# Altium PCB PCB4.PcbDoc (part 4 of 5)
Units mm, origin at the board's own origin, x right, y up, seen from the top; angles counter-clockwise.
Board outline 240 x 180 mm, 2 copper layers (Top Layer, Bottom Layer); 259 components, 311 nets, 1128 pads, 419 vias.
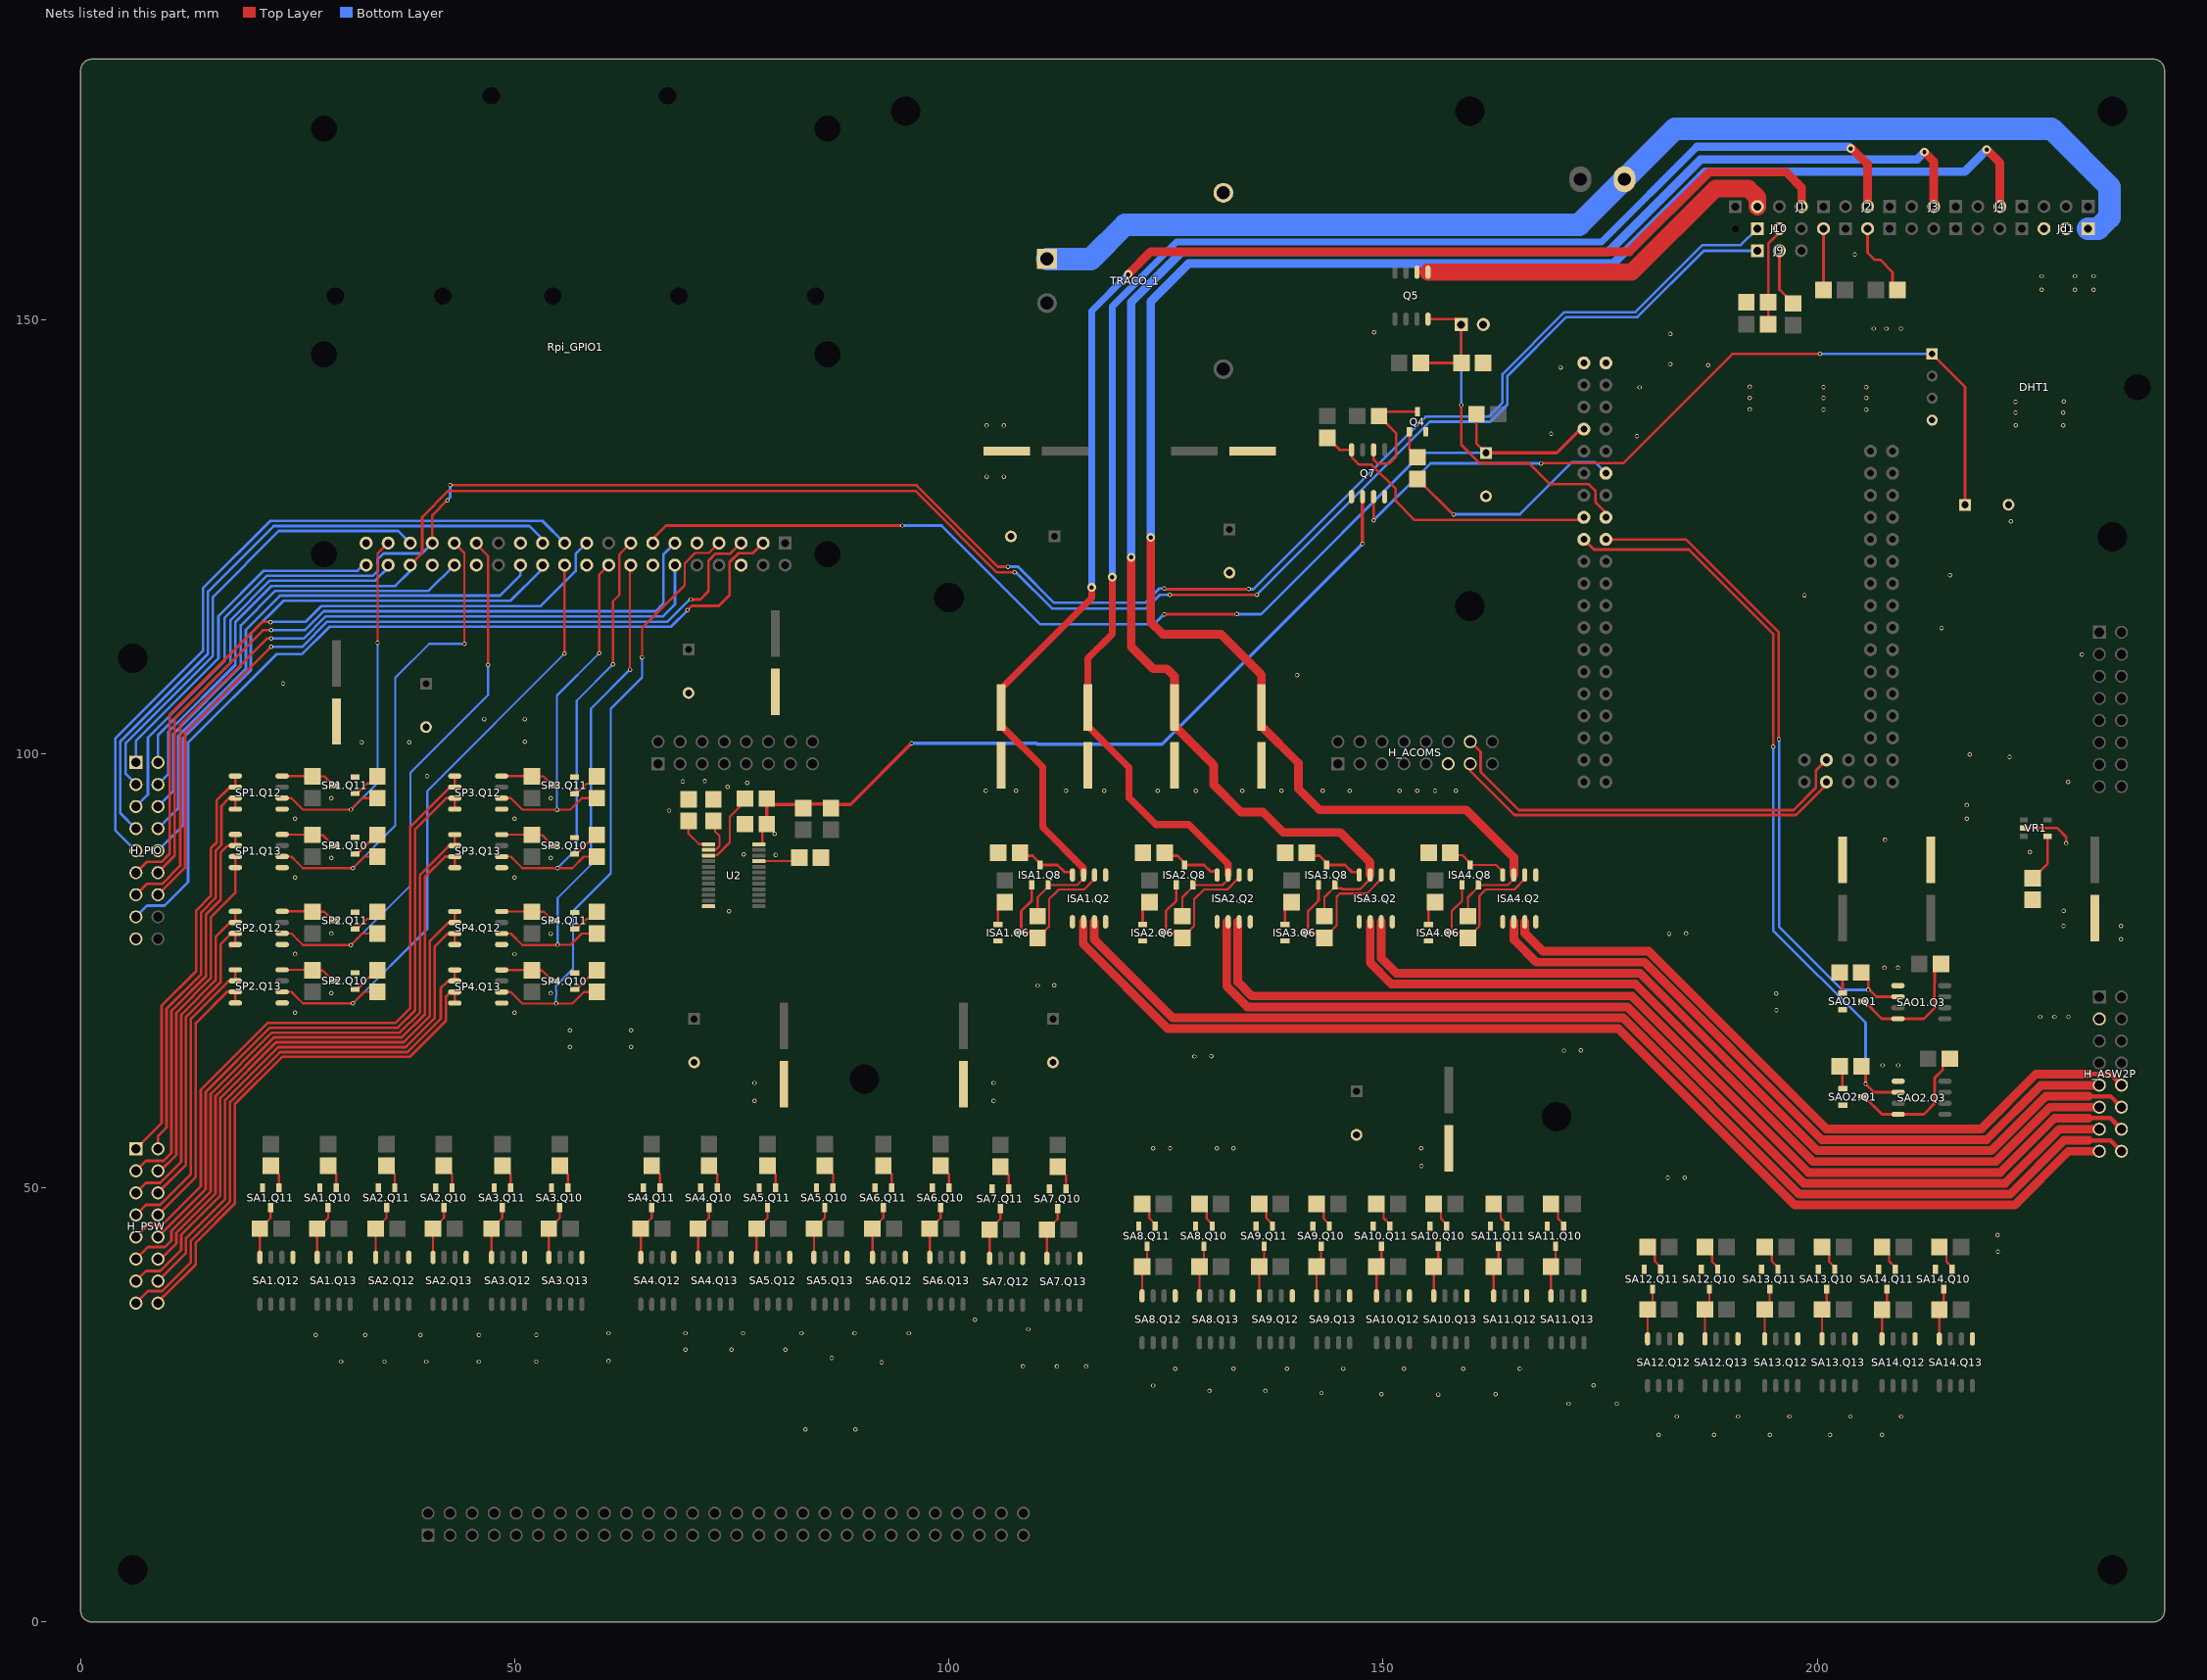
[diagram p3: the nets of this part, all layers, seen from the top]

## Via types
v1: diameter 0.5, hole 0.3, Top Layer to Bottom Layer, 387 vias
v2: diameter 0.5, hole 0.3, Top Layer to Bottom Layer, tented both sides, 24 vias
v3: diameter 1, hole 0.5, Top Layer to Bottom Layer, 8 vias

## Nets (pads, with @x,y where several pads share a name; then routed paths per layer and width w, separated by ;. In a path a pad name is that pad's centre, name@x,y a point inside that pad or via, vN(x,y) a via of type N, cw(c..) or ccw(c..) an arc to the next point about the centre after c; other vN are vias at no path point) (continued)
D02: pad.D2 R10.1 | length 26.4
  Top Layer w0.305: R10.1@153.966,131.66 158.053,127.574 v1(158.138,127.574)
  Bottom Layer w0.305: v1(158.138,127.574) 165.77,127.574 171.75,133.555 174.421,133.555 pad.D2@175.666,132.31
D06: JW1.1 pad.D6 Q5.4 R16D.2 R16U.1 | length 48.3
  Top Layer w0.305: R16U.1@154.354,145.01 R16D.2@159.024,145.01 159.006,145.028 JW1.1@159.006,149.44 158.38,150.066 Q5.4@155.171,150.066 ; v1(159.024,140.163) 159.024,135.565 161.147,133.442 166.838,133.442 169.238,131.042 173.713,131.042 174.459,130.297 174.459,128.979 175.437,128 175.437,127.459 pad.D6@175.666,127.23
  Bottom Layer w0.305: v1(159.024,140.163) JW1.1@159.024,149.44
D07: pad.D7 Q7.4 R4.1 | length 34.9
  Top Layer w0.305: R4.1@143.588,136.396 144.974,135.01 Q7.4@146.365,135.01 146.418,134.957 146.418,134.127 147.244,133.301 148.662,133.301 151.454,130.509 151.454,129.1 153.637,126.918 172.814,126.918 pad.D7@173.126,127.23
D08: pad.D8 SAO1.Q3.2 SAO1.R8.1 | length 77.4
  Top Layer w0.305: pad.D8@175.666,124.69 184.85,124.69 195.569,113.971 195.569,101.674 v1(195.594,101.649) ; SAO1.R8.1@205.084,74.8 205.882,74.002 v1@205.882,72.99 ; v1(205.882,72.81) 206.009,72.81 206.796,72.023 SAO1.Q3.2@209.3,72.023
  Bottom Layer w0.305: v1(195.594,101.649) 195.611,101.632 195.611,80.068 202.869,72.81 v1(205.882,72.81)
D09: pad.D9 SAO2.Q3.2 SAO2.R8.1 | length 88.9
  Top Layer w0.305: pad.D9@173.126,124.69 174.3,123.516 185.225,123.516 194.937,113.805 v1(194.937,100.81) ; SAO2.R8.1@205.094,63.988 205.576,63.506 v1(205.576,61.981) 206.541,61.016 SAO2.Q3.2@209.324,61.016
  Bottom Layer w0.305: v1(194.937,100.81) 194.937,79.652 205.576,69.013 v1(205.576,61.981)
GND: C1.2 C2.2 C3.2 C4.2 C5.2 C6.2 C7.2 C8.2 C9.2 C10.2 C11.2 C12.2 C13.2 C14.2 C15.2 C17.2 C18.2 C24.2 C25.2 C28.2 C29.2 C30.2 C31.2 DHT1.4 H_ACOMS.11 H_ASW2P.3 H_PIO.17 ISA1.Q2.1 ISA1.Q6.2 ISA1.R15.2 ISA2.Q2.1 ISA2.Q6.2 ISA2.R15.2 ISA3.Q2.1 ISA3.Q6.2 ISA3.R15.2 ISA4.Q2.1 ISA4.Q6.2 ISA4.R15.2 Jd1.2 Jd1.3 JW1.2 pad.GND@1 pad.GND@2 Q4.2 R6.2 R16D.1 R20.2 R21.2 R22.2 Rpi_GPIO1.6 Rpi_GPIO1.9 Rpi_GPIO1.14 Rpi_GPIO1.20 Rpi_GPIO1.25 Rpi_GPIO1.30 Rpi_GPIO1.34 Rpi_GPIO1.39 SA1.Q10.2 SA1.Q11.2 SA1.Q12.1 SA1.Q13.1 SA2.Q10.2 SA2.Q11.2 SA2.Q12.1 SA2.Q13.1 SA3.Q10.2 SA3.Q11.2 SA3.Q12.1 SA3.Q13.1 SA4.Q10.2 SA4.Q11.2 SA4.Q12.1 SA4.Q13.1 SA5.Q10.2 SA5.Q11.2 SA5.Q12.1 SA5.Q13.1 SA6.Q10.2 SA6.Q11.2 SA6.Q12.1 SA6.Q13.1 SA7.Q10.2 SA7.Q11.2 SA7.Q12.1 SA7.Q13.1 SA8.Q10.2 SA8.Q11.2 SA8.Q12.1 SA8.Q13.1 SA9.Q10.2 SA9.Q11.2 SA9.Q12.1 SA9.Q13.1 SA10.Q10.2 SA10.Q11.2 SA10.Q12.1 SA10.Q13.1 SA11.Q10.2 SA11.Q11.2 SA11.Q12.1 SA11.Q13.1 SA12.Q10.2 SA12.Q11.2 SA12.Q12.1 SA12.Q13.1 SA13.Q10.2 SA13.Q11.2 SA13.Q12.1 SA13.Q13.1 SA14.Q10.2 SA14.Q11.2 SA14.Q12.1 SA14.Q13.1 SAO1.Q1.2 SAO1.Q3.1 SAO2.Q1.2 SAO2.Q3.1 SP1.Q10.2 SP1.Q11.2 SP1.Q12.1 SP1.Q13.1 SP2.Q10.2 SP2.Q11.2 SP2.Q12.1 SP2.Q13.1 SP3.Q10.2 SP3.Q11.2 SP3.Q12.1 SP3.Q13.1 SP4.Q10.2 SP4.Q11.2 SP4.Q12.1 SP4.Q13.1 TRACO_1.2 U2.12 VR1.2 | length 6.1
  Top Layer w0.305: VR1.2@223.795,91.44 227.67,91.44 228.68,90.43 v1(228.68,89.68)
  other v1: 181.734,21.55 188.121,21.55 194.534,21.55 201.465,21.55 207.478,21.55 83.487,22.185 89.216,22.185 183.838,23.674 190.877,23.674 196.825,23.674 203.827,23.674 209.688,23.674 171.359,25.136 176.923,25.136 156.359,26.203 149.809,26.224 162.953,26.245 142.907,26.379 129.989,26.608 136.444,26.608 123.539,27.222 174.254,27.256 126.053,29.153 132.783,29.153 138.914,29.153 152.412,29.153 159.245,29.153 165.742,29.153 145.404,29.192 108.54,29.43 112.432,29.43 115.787,29.43 92.241,29.919 29.974,29.99 34.982,29.99 39.807,29.99 45.867,29.99 52.471,29.99 60.794,30.054 86.492,30.417 69.659,31.356 74.969,31.356 81.146,31.356 27.05,33.064 32.771,33.064 39.129,33.064 45.867,33.064 52.471,33.064 60.794,33.261 69.659,33.261 76.281,33.261 82.999,33.261 89.137,33.261 95.393,33.261 109.124,33.714 102.994,34.802 220.809,42.659 220.795,44.59 182.786,51.17 184.716,51.183 154.408,52.534 123.539,54.548 125.47,54.548 130.846,54.548 132.777,54.548 154.394,54.548 77.595,60.029 105.155,60.029 77.595,62.089 105.155,62.089 207.532,64.118 209.341,64.118 128.288,65.135 130.219,65.149 170.83,65.814 172.761,65.828 56.347,66.222 63.396,66.222 56.333,68.153 63.382,68.153 225.705,69.699 227.349,69.699 228.934,69.699 24.68,70.182 49.956,70.172 195.308,70.451 195.294,72.382 54.154,72.415 28.877,72.426 110.203,73.314 112.134,73.328 207.751,75.35 209.3,75.35 24.68,76.933 49.957,76.923 234.995,78.66 28.877,79.298 54.154,79.288 182.956,79.286 184.887,79.3 228.37,80.16 234.995,80.16 228.373,81.933 133.375,83.06 114.656,83.09 116.754,83.076 131.286,83.076 148.056,83.143 166.543,83.143 149.987,83.157 164.698,83.157 24.679,85.772 49.954,85.763 28.877,88.015 54.152,88.007 224.5,88.7 207.83,90.076 49.955,92.514 24.68,92.522 217.217,92.517 217.217,94.078 28.877,94.888 54.152,94.879 104.255,95.742 107.715,95.742 113.465,95.742 117.87,95.742 124.028,95.742 128.446,95.742 133.778,95.742 138.295,95.742 143.049,95.742 146.165,95.742 151.909,95.742 153.947,95.742 155.994,95.742 158.377,95.742 228.892,96.77 39.892,97.448 222.163,99.632 217.56,99.93 32.339,101.335 37.852,101.335 51.156,101.39 46.458,103.994 51.156,103.994 23.308,108.074 140.09,109.06 230.507,111.439 214.32,114.49 198.526,118.268 215.287,120.54 222.3,126.78 179.231,136.596 169.363,136.85 222.86,137.84 228.355,137.84 222.84,139.296 228.355,139.296 200.723,139.645 205.64,139.645 192.24,139.66 222.84,140.522 228.387,140.589 200.723,140.97 205.64,140.97 192.24,140.985 179.544,142.194 200.723,142.24 205.64,142.24 192.24,142.255 170.437,144.501 187.441,144.767 183.074,144.856 183.074,148.373 148.98,148.559 206.528,148.96 207.954,148.96 209.64,148.96 225.878,153.43 229.687,153.43 231.843,153.43 225.878,155 229.687,155 231.843,155 204.34,157.52
  other v2: 74.655,81.849 80.054,88.342 76.372,88.392 67.758,93.454 74.488,96.184 76.76,96.649 69.341,96.793 71.879,96.841
GND-12V: C22.2 C23.2 Jd1.1 P1.1 TRACO_1.1 | length 137.9
  Bottom Layer w2.6: TRACO_1.1@111.294,156.99 116.35,156.99 120.28,160.92 172.556,160.92 P1.1@177.804,166.168 183.632,171.996 226.963,171.996 233.674,165.285 233.674,161.78 232.374,160.48 Jd1.1@231.203,160.48
  other v1: 104.33,131.92 106.328,131.92 104.33,137.8 106.328,137.8
HS_I2C_SW: C28.1 Q7.5 Q7.6 R19.1 R23.1 R24.1 U2.24 | length 92.3
  Top Layer w0.254: U2.24@78.516,89.575 C28.1@78.516,91.905
  Top Layer w0.381: R19.1@79.016,94.5 C28.1@79.016,91.905 C28.1@79.034,91.923 ; R19.1@79.016,94.836 79.678,94.174 82.811,94.174 R23.1@83.236,93.75 83.689,94.203 85.949,94.203 R24.1@86.402,93.75 ; R24.1@86.402,94.15 88.637,94.15 v1(95.687,101.2) ; v1(147.635,124.187) Q7.6@147.635,129.61
  Bottom Layer w0.381: v1(95.687,101.2) 110.094,101.2 110.183,101.111 124.559,101.111 v1(147.635,124.187)
  other v2: 79.916,90.786
INV_5V12V_HS_1: H_ASW2P.15 ISA1.Q2.5 ISA1.Q2.6 | length 134.6
  Top Layer w1: ISA1.Q2.6@115.464,80.648 115.464,78.108 125.23,68.342 177.1,68.342 197.42,48.022 199.867,48.022 222.736,48.022 228.934,54.22 H_ASW2P.15@232.5,54.22
INV_5V12V_HS_2: H_ASW2P.13 ISA2.Q2.5 ISA2.Q2.6 | length 119.9
  Top Layer w1: ISA2.Q2.6@131.994,80.647 131.994,73.225 134.369,70.85 178.139,70.85 198.459,50.53 208.125,50.53 221.652,50.53 227.882,56.76 H_ASW2P.13@232.5,56.76
INV_5V12V_HS_3: H_ASW2P.11 ISA3.Q2.5 ISA3.Q2.6 | length 100.8
  Top Layer w1: ISA3.Q2.6@148.524,80.647 148.524,75.918 150.96,73.482 179.054,73.482 199.498,53.038 207.086,53.038 220.568,53.038 226.83,59.3 H_ASW2P.11@232.5,59.3
INV_5V12V_HS_4: H_ASW2P.9 ISA4.Q2.5 ISA4.Q2.6 | length 81.7
  Top Layer w1: ISA4.Q2.6@165.07,80.647 165.07,78.571 167.651,75.99 180.093,75.99 200.537,55.546 219.509,55.546 225.785,61.822 232.482,61.822 H_ASW2P.9@232.5,61.84
INV_5V12V_LS_1: H_ASW2P.16 ISA1.Q2.7 ISA1.Q2.8 | length 135.6
  Top Layer w0.5: 231.23,55.474 233.786,55.474 H_ASW2P.16@235.04,54.22
  Top Layer w1: ISA1.Q2.7@116.734,80.648 116.734,78.611 125.749,69.596 177.62,69.596 197.94,49.276 208.644,49.276 222.217,49.276 228.415,55.474 231.23,55.474
INV_5V12V_LS_2: H_ASW2P.14 ISA2.Q2.7 ISA2.Q2.8 | length 120.9
  Top Layer w0.5: 231.23,58.046 233.754,58.046 H_ASW2P.14@235.04,56.76
  Top Layer w1: ISA2.Q2.7@133.264,80.647 133.264,73.728 134.888,72.104 178.659,72.104 198.979,51.784 207.605,51.784 221.087,51.784 227.349,58.046 231.23,58.046
INV_5V12V_LS_3: H_ASW2P.12 ISA3.Q2.7 ISA3.Q2.8 | length 101.7
  Top Layer w0.5: 231.23,60.554 233.786,60.554 H_ASW2P.12@235.04,59.3
  Top Layer w1: ISA3.Q2.7@149.794,80.647 149.794,76.456 151.514,74.736 179.574,74.736 200.018,54.292 206.566,54.292 220.048,54.292 226.31,60.554 231.23,60.554
INV_5V12V_LS_4: H_ASW2P.10 ISA4.Q2.7 ISA4.Q2.8 | length 82.5
  Top Layer w0.5: 231.23,63.116 233.764,63.116 H_ASW2P.10@235.04,61.84
  Top Layer w1: ISA4.Q2.7@166.324,80.647 166.324,79.338 168.418,77.244 180.612,77.244 201.056,56.8 218.9,56.8 225.21,63.11 231.23,63.11
ISA1.Vss: C10.1 ISA1.Q2.3 ISA1.Q8.2 ISA1.R14.2 J1.2 | length 173.5
  Top Layer w0.254: ISA1.R14.2@110.22,81.3 110.22,83.458 111.435,84.672 ISA1.Q8.2@111.435,84.897 111.441,84.891 114.782,84.891 115.464,85.573 ISA1.Q2.3@115.464,86.048
  Top Layer w0.8: ISA1.Q2.3@115.464,86.048 115.464,86.863 110.788,91.539 110.788,98.457 106.17,103.075 106.1,103.075 106,103.175 106,107.525 106.1,107.625 106.106,107.625 116.428,117.947 v3(116.428,119.158)
  Top Layer w1: v3(120.65,155.22) 120.656,155.22 123.264,157.828 178.378,157.828 187.532,166.982 196.442,166.982 198.222,165.203 198.222,163.058 J1.2@198.183,163.02
  Bottom Layer w0.8: v3(116.428,119.158) 116.428,150.992 120.65,155.214 v3(120.65,155.22)
ISA2.Vss: C8.1 ISA2.Q2.3 ISA2.Q8.2 ISA2.R14.2 J2.2 | length 184.8
  Top Layer w0.254: ISA2.R14.2@126.878,81.3 126.878,83.458 128.092,84.672 ISA2.Q8.2@128.092,84.897 128.103,84.886 129.197,84.886 129.202,84.891 131.519,84.891 131.994,85.367 ISA2.Q2.3@131.994,86.047
  Top Layer w0.8: v3(118.798,120.344) 118.798,113.798 115.996,110.996 115.996,105.354 C8.1@116,105.35 116,103.175 120.75,98.425 120.75,94.942 123.846,91.846 127.631,91.846 132.156,87.321 ISA2.Q2.3@132.156,86.047
  Top Layer w1: v3(203.851,169.706) 203.995,169.706 205.803,167.898 J2.2@205.803,163.03
  Bottom Layer w0.8: v3(118.798,120.344) 118.798,151.538 126.21,158.95 175.176,158.95 186.142,169.916
  Bottom Layer w1: 186.142,169.916 203.642,169.916 v3(203.851,169.706)
ISA3.Vss: C9.1 ISA3.Q2.3 ISA3.Q8.2 ISA3.R14.2 J3.2 | length 198.3
  Top Layer w0.254: ISA3.R14.2@143.245,81.3 143.245,83.458 ISA3.Q8.2@144.46,84.672 ; ISA3.Q8.2@144.46,84.897 ISA3.Q8.2@144.46,84.886 ; ISA3.Q2.3@148.5,86.072 148.5,85.548 147.354,84.402 145.286,84.402 145.189,84.499 144.633,84.499 ISA3.Q8.2@144.46,84.672 ; ISA3.Q8.2@144.46,84.672 ISA3.Q8.2@144.46,84.886 ; ISA3.Q8.2@144.46,84.672 ISA3.Q8.2@144.46,84.886
  Top Layer w1: v3(120.992,122.627) 120.992,112.34 123.544,109.788 125.112,109.788 126,108.9 126,103.175 130.498,98.677 130.498,96.436 133.646,93.288 136.16,93.288 138.508,90.94 145.068,90.94 148.5,87.508 ISA3.Q2.3@148.5,86.072 ; v3(212.347,169.297) 213.423,168.22 J3.2@213.423,163.03
  Bottom Layer w1: v3(120.992,122.627) 120.992,152.008 126.78,157.796 175.922,157.796 186.578,168.452 211.502,168.452 v3(212.347,169.297)
ISA4.Vss: C11.1 ISA4.Q2.3 ISA4.Q8.2 ISA4.R14.2 J4.2 | length 216.8
  Top Layer w0.254: ISA4.R14.2@159.775,81.3 159.775,83.458 160.99,84.672 ISA4.Q8.2@160.99,84.897 160.996,84.891 164.373,84.891 165.054,85.572 ISA4.Q2.3@165.054,86.047
  Top Layer w1: v3(123.242,124.921) 123.242,115.16 124.628,113.774 131.33,113.774 136,109.104 C11.1@136,105.35 136,103.175 140.25,98.925 140.25,95.958 142.674,93.534 159.574,93.534 165.054,88.054 ISA4.Q2.3@165.054,86.047 ; v3(219.524,169.58) 221.043,168.06 J4.2@221.043,163.03
  Bottom Layer w1: v3(123.242,124.921) 123.242,152.092 127.6,156.45 176.518,156.45 187.106,167.038 216.982,167.038 v3(219.524,169.58)
MISO: H_ACOMS.13 pad.D50 | length 45.7
  Top Layer w0.305: H_ACOMS.13@160.04,98.85 160.04,98.01 165.106,92.944 197.556,92.944 201.066,96.454 pad.D50@201.066,96.75
MOSI: H_ACOMS.14 pad.D51 | length 49.2
  Top Layer w0.305: H_ACOMS.14@160.04,101.39 161.23,100.2 161.23,97.9 165.628,93.502 197.268,93.502 199.85,96.084 199.85,98.074 pad.D51@201.066,99.29
NetC29_1: C29.1 DHT1.1 Q7.7 Q7.8 | length 94
  Top Layer w0.305: v1(148.905,126.876) Q7.7@148.905,129.61 ; v1(168.21,133.442) 168.234,133.466 177.652,133.466 190.235,146.05 v1(200.309,146.05) ; DHT1.1@213.234,146.05 217.03,142.254 C29.1@217.03,128.68
  Bottom Layer w0.305: v1(148.905,126.876) 155.471,133.442 v1(168.21,133.442) ; v1(200.309,146.05) 213.027,146.05 213.13,145.946 DHT1.1@213.234,146.05
NetC30_1: C30.1 VR1.4 | length 5.5
  Top Layer w0.305: C30.1@224.83,85.67 226.545,87.385 VR1.4@226.545,90.49
NetISA1.Q2_2: ISA1.Q2.2 ISA1.Q6.3 ISA1.Q8.1 ISA1.R14.1 | length 20.2
  Top Layer w0.254: ISA1.R14.1@110.22,78.8 111.511,80.091 111.511,80.152 111.551,80.192 111.551,83.261 112.673,84.383 115.57,84.383 116.734,85.547 ISA1.Q2.2@116.734,86.048
  Top Layer w0.305: ISA1.Q6.3@107.959,79.4 ISA1.Q6.3@108.184,79.4 ; ISA1.Q8.1@109.535,84.897 109.535,83.09 108.332,81.886 108.332,79.548 ISA1.Q6.3@108.184,79.4 ; ISA1.R14.1@110.22,78.8 109.62,79.4 108.332,79.4 ISA1.Q6.3@108.184,79.4
NetISA1.Q2_4: ISA1.Q2.4 ISA1.Q8.3 ISA1.R15.1 | length 7.3
  Top Layer w0.305: ISA1.R15.1@108.189,88.597 108.522,88.264 109.643,88.264 110.485,87.422 ISA1.Q8.3@110.485,87.197 112.504,87.197 113.331,86.37 114.093,86.37 114.229,86.234 ISA1.Q2.4@114.229,86.047
NetISA1.Q6_1: ISA1.Q6.1 ISA1.R13.2 | length 2.9
  Top Layer w0.305: ISA1.Q6.1@105.659,80.35 105.659,82.13 ISA1.R13.2@106.439,82.91
NetISA2.Q2_2: ISA2.Q2.2 ISA2.Q6.3 ISA2.Q8.1 ISA2.R14.1 | length 20
  Top Layer w0.254: ISA2.R14.1@126.878,78.8 128.249,80.171 128.249,83.245 129.388,84.383 132.075,84.383 133.264,85.572 ISA2.Q2.2@133.264,86.047
  Top Layer w0.305: ISA2.Q6.3@124.616,79.4 ISA2.Q6.3@124.841,79.4 ; ISA2.Q8.1@126.192,84.897 126.192,83.09 124.989,81.886 124.989,79.548 ISA2.Q6.3@124.841,79.4 ; ISA2.R14.1@126.878,78.8 126.278,79.4 124.989,79.4 ISA2.Q6.3@124.841,79.4
NetISA2.Q2_4: ISA2.Q2.4 ISA2.Q8.3 ISA2.R15.1 | length 7.4
  Top Layer w0.305: ISA2.R15.1@124.847,88.597 125.179,88.264 126.3,88.264 127.142,87.422 ISA2.Q8.3@127.142,87.197 129.381,87.197 130.129,86.449 130.75,86.449 130.886,86.312 ISA2.Q2.4@130.886,86.047
NetISA2.Q6_1: ISA2.Q6.1 ISA2.R13.2 | length 2.9
  Top Layer w0.305: ISA2.Q6.1@122.316,80.35 122.316,82.13 ISA2.R13.2@123.097,82.91
NetISA3.Q2_2: ISA3.Q2.2 ISA3.Q6.3 ISA3.Q8.1 ISA3.R14.1 | length 20.2
  Top Layer w0.254: ISA3.R14.1@143.245,78.8 144.664,80.219 144.664,83.526 145.032,83.894 148.116,83.894 149.794,85.572 ISA3.Q2.2@149.794,86.047
  Top Layer w0.305: ISA3.Q6.3@140.984,79.4 141.209,79.4 141.357,79.548 141.357,81.886 142.56,83.09 ISA3.Q8.1@142.56,84.897 ; ISA3.Q6.3@141.357,79.4 142.645,79.4 ISA3.R14.1@143.245,78.8
NetISA3.Q2_4: ISA3.Q2.4 ISA3.Q8.3 ISA3.R15.1 | length 7.3
  Top Layer w0.305: ISA3.R15.1@141.214,88.597 141.547,88.264 142.668,88.264 143.362,87.57 143.51,87.422 ISA3.Q8.3@143.51,87.197 145.605,87.197 146.432,86.37 147.118,86.37 147.254,86.234 ISA3.Q2.4@147.254,86.047
NetISA3.Q6_1: ISA3.Q6.1 ISA3.R13.2 | length 2.9
  Top Layer w0.305: ISA3.Q6.1@138.684,80.35 138.684,82.13 ISA3.R13.2@139.464,82.91
NetISA4.Q2_2: ISA4.Q2.2 ISA4.Q6.3 ISA4.Q8.1 ISA4.R14.1 | length 20.5
  Top Layer w0.254: ISA4.Q6.3@157.514,79.4 ISA4.Q6.3@157.739,79.4 ; ISA4.Q8.1@159.09,84.897 159.09,83.054 157.912,81.876 157.912,79.573 ISA4.Q6.3@157.739,79.4 ; ISA4.Q2.2@166.324,86.047 166.324,85.572 165.135,84.383 161.84,84.383 161.106,83.65 161.106,80.131 ISA4.R14.1@159.775,78.8 159.175,79.4 ISA4.Q6.3@157.739,79.4
NetISA4.Q2_4: ISA4.Q2.4 ISA4.Q8.3 ISA4.R15.1 | length 7.5
  Top Layer w0.254: ISA4.R15.1@157.744,88.597 158.031,88.311 159.151,88.311 159.867,87.595 160.04,87.422 ISA4.Q8.3@160.04,87.197 163.026,87.197 163.784,86.44 ISA4.Q2.4@163.784,86.047
NetISA4.Q6_1: ISA4.Q6.1 ISA4.R13.2 | length 2.9
  Top Layer w0.305: ISA4.Q6.1@155.214,80.35 155.214,82.13 ISA4.R13.2@155.994,82.91
NetJ7_2: J7.2 Q5.5 Q5.6 | length 44.7
  Top Layer w0.508: Q5.6@153.901,155.466 Q5.5@155.171,155.466
  Top Layer w2: Q5.5@155.171,155.466 178.65,155.466 188.284,165.1 192.084,165.1 193.103,164.08 J7.2@193.103,163.02
NetJ9_2: J9.2 R7.1 | length 6.3
  Top Layer w0.305: J9.2@195.643,157.497 195.643,153.454 R7.1@197.237,151.86
NetJ10_2: J10.2 R5.2 R6.1 | length 11.1
  Top Layer w0.305: R5.2@194.382,149.49 194.382,158.775 J10.2@195.643,160.037
NetJ11_2: J11.2 R2.2 | length 6.6
  Top Layer w0.305: R2.2@200.723,153.43 J11.2@200.723,160.037
NetJ12_2: J12.2 R3.1 | length 8.8
  Top Layer w0.305: J12.2@205.803,160.48 205.803,157.706 206.616,156.893 207.247,156.893 208.686,155.454 208.686,153.994 R3.1@209.25,153.43
NetQ4_1: Q4.1 R10.2 | length 3.3
  Top Layer w0.305: Q4.1@153.016,137.085 153.016,135.11 R10.2@153.966,134.16
NetQ4_3: Q4.3 Q7.2 R16.1 | length 14.4
  Top Layer w0.305: Q7.2@148.905,135.01 148.905,133.895 149.389,133.41 150.68,133.41 151.516,134.246 151.516,136.911 R16.1@149.53,138.897 150.018,139.385 Q4.3@153.966,139.385
NetR19_2: R19.2 U2.3 | length 8.7
  Top Layer w0.254: U2.3@72.121,88.319 73.3,88.319 74.754,89.773 74.754,92.738 R19.2@76.516,94.5
NetR20_1: R20.1 U2.1 | length 4.3
  Top Layer w0.254: R20.1@70.004,92.25 70.004,90.8 71.229,89.575 U2.1@72.318,89.575
NetR21_1: R21.1 U2.2 | length 4.8
  Top Layer w0.254: U2.2@72.212,88.969 73.188,88.969 73.575,89.356 73.575,90.552 73.059,91.068 73.059,91.909 R21.1@72.718,92.25
NetR22_1: R22.1 U2.21 | length 4.9
  Top Layer w0.254: U2.21@78.035,87.653 82.378,87.653 R22.1@82.75,88.025
NetSA1.Q10_1: SA1.Q10.1 SA1.R11.2 | length 2.9
  Top Layer w0.254: SA1.R11.2@28.487,52.549 29.437,51.599 SA1.Q10.1@29.437,50.018
NetSA1.Q10_3: SA1.Q10.3 SA1.Q13.4 SA1.R18.1 | length 6.2
  Top Layer w0.254: SA1.Q13.4@27.237,41.999 SA1.R18.1@27.237,45.299 28.487,46.549 SA1.Q10.3@28.487,47.718
NetSA1.Q11_1: SA1.Q11.1 SA1.R12.2 | length 2.9
  Top Layer w0.254: SA1.R12.2@21.883,52.549 22.833,51.599 SA1.Q11.1@22.833,50.018
NetSA1.Q11_3: SA1.Q11.3 SA1.Q12.4 SA1.R17.1 | length 6.2
  Top Layer w0.254: SA1.Q12.4@20.633,41.999 SA1.R17.1@20.633,45.299 21.883,46.549 SA1.Q11.3@21.883,47.718
NetSA2.Q10_1: SA2.Q10.1 SA2.R11.2 | length 2.9
  Top Layer w0.254: SA2.R11.2@41.829,52.548 42.779,51.598 SA2.Q10.1@42.779,50.018
NetSA2.Q10_3: SA2.Q10.3 SA2.Q13.4 SA2.R18.1 | length 12.5
  Top Layer w0.254: SA2.R18.1@40.579,45.298 41.829,46.548 ; SA2.R18.1@40.579,45.298 SA2.Q13.4@40.579,41.998 SA2.R18.1@40.579,45.298 ; SA2.R18.1@40.579,45.298 41.829,46.548 ; 41.829,46.548 SA2.Q10.3@41.829,47.718 41.829,46.548
NetSA2.Q11_1: SA2.Q11.1 SA2.R12.2 | length 2.9
  Top Layer w0.254: SA2.R12.2@35.225,52.548 36.175,51.598 SA2.Q11.1@36.175,50.018
NetSA2.Q11_3: SA2.Q11.3 SA2.Q12.4 SA2.R17.1 | length 12.5
  Top Layer w0.254: SA2.R17.1@33.975,45.298 SA2.Q12.4@33.975,41.998 SA2.R17.1@33.975,45.298 ; SA2.R17.1@33.975,45.298 35.225,46.548 ; SA2.R17.1@33.975,45.298 35.225,46.548 ; 35.225,46.548 SA2.Q11.3@35.225,47.718 35.225,46.548
NetSA3.Q10_1: SA3.Q10.1 SA3.R11.2 | length 2.9
  Top Layer w0.254: SA3.R11.2@55.171,52.548 56.121,51.598 SA3.Q10.1@56.121,50.018
NetSA3.Q10_3: SA3.Q10.3 SA3.Q13.4 SA3.R18.1 | length 6.2
  Top Layer w0.254: SA3.Q13.4@53.921,41.998 SA3.R18.1@53.921,45.298 55.171,46.548 SA3.Q10.3@55.171,47.718
NetSA3.Q11_1: SA3.Q11.1 SA3.R12.2 | length 2.9
  Top Layer w0.254: SA3.R12.2@48.567,52.548 49.517,51.598 SA3.Q11.1@49.517,50.018
NetSA3.Q11_3: SA3.Q11.3 SA3.Q12.4 SA3.R17.1 | length 6.2
  Top Layer w0.254: SA3.Q12.4@47.317,41.998 SA3.R17.1@47.317,45.298 48.567,46.548 SA3.Q11.3@48.567,47.718
NetSA4.Q10_1: SA4.Q10.1 SA4.R11.2 | length 2.9
  Top Layer w0.254: SA4.R11.2@72.359,52.548 73.309,51.598 SA4.Q10.1@73.309,50.018
NetSA4.Q10_3: SA4.Q10.3 SA4.Q13.4 SA4.R18.1 | length 6.2
  Top Layer w0.254: SA4.Q13.4@71.109,41.998 SA4.R18.1@71.109,45.298 72.359,46.548 SA4.Q10.3@72.359,47.718
NetSA4.Q11_1: SA4.Q11.1 SA4.R12.2 | length 2.9
  Top Layer w0.254: SA4.R12.2@65.755,52.548 66.705,51.598 SA4.Q11.1@66.705,50.018
NetSA4.Q11_3: SA4.Q11.3 SA4.Q12.4 SA4.R17.1 | length 6.2
  Top Layer w0.254: SA4.Q12.4@64.505,41.998 SA4.R17.1@64.505,45.298 65.755,46.548 SA4.Q11.3@65.755,47.718
NetSA5.Q10_1: SA5.Q10.1 SA5.R11.2 | length 2.9
  Top Layer w0.254: SA5.R11.2@85.699,52.548 86.649,51.598 SA5.Q10.1@86.649,50.018
NetSA5.Q10_3: SA5.Q10.3 SA5.Q13.4 SA5.R18.1 | length 6.2
  Top Layer w0.254: SA5.Q13.4@84.449,41.998 SA5.R18.1@84.449,45.298 85.699,46.548 SA5.Q10.3@85.699,47.718
NetSA5.Q11_1: SA5.Q11.1 SA5.R12.2 | length 2.9
  Top Layer w0.254: SA5.R12.2@79.095,52.548 80.045,51.598 SA5.Q11.1@80.045,50.018
NetSA5.Q11_3: SA5.Q11.3 SA5.Q12.4 SA5.R17.1 | length 6.2
  Top Layer w0.254: SA5.Q12.4@77.845,41.998 SA5.R17.1@77.845,45.298 79.095,46.548 SA5.Q11.3@79.095,47.718
NetSA6.Q10_1: SA6.Q10.1 SA6.R11.2 | length 2.9
  Top Layer w0.254: SA6.R11.2@99.041,52.548 99.991,51.598 SA6.Q10.1@99.991,50.018
NetSA6.Q10_3: SA6.Q10.3 SA6.Q13.4 SA6.R18.1 | length 6.2
  Top Layer w0.254: SA6.Q13.4@97.791,41.998 SA6.R18.1@97.791,45.298 99.041,46.548 SA6.Q10.3@99.041,47.718
NetSA6.Q11_1: SA6.Q11.1 SA6.R12.2 | length 2.9
  Top Layer w0.254: SA6.R12.2@92.437,52.548 93.387,51.598 SA6.Q11.1@93.387,50.018
NetSA6.Q11_3: SA6.Q11.3 SA6.Q12.4 SA6.R17.1 | length 6.2
  Top Layer w0.254: SA6.Q12.4@91.187,41.998 SA6.R17.1@91.187,45.298 92.437,46.548 SA6.Q11.3@92.437,47.718
NetSA7.Q10_1: SA7.Q10.1 SA7.R11.2 | length 2.9
  Top Layer w0.254: SA7.R11.2@112.53,52.443 113.48,51.493 SA7.Q10.1@113.48,49.913
NetSA7.Q10_3: SA7.Q10.3 SA7.Q13.4 SA7.R18.1 | length 6.2
  Top Layer w0.254: SA7.Q13.4@111.28,41.893 SA7.R18.1@111.28,45.193 112.53,46.443 SA7.Q10.3@112.53,47.613
NetSA7.Q11_1: SA7.Q11.1 SA7.R12.2 | length 2.9
  Top Layer w0.254: SA7.R12.2@105.927,52.443 106.877,51.493 SA7.Q11.1@106.877,49.913
NetSA7.Q11_3: SA7.Q11.3 SA7.Q12.4 SA7.R17.1 | length 6.2
  Top Layer w0.254: SA7.Q12.4@104.677,41.893 SA7.R17.1@104.677,45.193 105.927,46.443 SA7.Q11.3@105.927,47.613
NetSA8.Q10_1: SA8.Q10.1 SA8.R11.2 | length 3.2
  Top Layer w0.254: SA8.R11.2@128.846,48.138 129.669,47.315 129.669,46.457 130.315,45.811 SA8.Q10.1@130.315,45.586
NetSA8.Q10_3: SA8.Q10.3 SA8.Q13.4 SA8.R18.1 | length 5.9
  Top Layer w0.254: SA8.Q13.4@128.846,37.567 SA8.R18.1@128.846,40.938 129.365,41.457 SA8.Q10.3@129.365,43.286
NetSA8.Q11_1: SA8.Q11.1 SA8.R12.2 | length 3.2
  Top Layer w0.254: SA8.R12.2@122.243,48.138 123.066,47.315 123.066,46.51 123.765,45.811 SA8.Q11.1@123.765,45.586
NetSA8.Q11_3: SA8.Q11.3 SA8.Q12.4 SA8.R17.1 | length 6
  Top Layer w0.254: SA8.Q12.4@122.243,37.567 SA8.R17.1@122.243,40.938 122.815,41.51 SA8.Q11.3@122.815,43.286
NetSA9.Q10_1: SA9.Q10.1 SA9.R11.2 | length 3.2
  Top Layer w0.254: SA9.R11.2@142.342,48.138 143.165,47.315 143.165,46.457 143.811,45.811 SA9.Q10.1@143.811,45.586
NetSA9.Q10_3: SA9.Q10.3 SA9.Q13.4 SA9.R18.1 | length 5.9
  Top Layer w0.254: SA9.Q13.4@142.342,37.567 SA9.R18.1@142.342,40.938 142.861,41.457 SA9.Q10.3@142.861,43.286
NetSA9.Q11_1: SA9.Q11.1 SA9.R12.2 | length 3.2
  Top Layer w0.254: SA9.R12.2@135.739,48.138 136.562,47.315 136.562,46.51 137.261,45.811 SA9.Q11.1@137.261,45.586
NetSA9.Q11_3: SA9.Q11.3 SA9.Q12.4 SA9.R17.1 | length 6
  Top Layer w0.254: SA9.Q12.4@135.739,37.567 SA9.R17.1@135.739,40.938 136.311,41.51 SA9.Q11.3@136.311,43.286
NetSA10.Q10_1: SA10.Q10.1 SA10.R11.2 | length 3.2
  Top Layer w0.254: SA10.R11.2@155.84,48.138 156.663,47.315 156.663,46.457 157.309,45.811 SA10.Q10.1@157.309,45.586
NetSA10.Q10_3: SA10.Q10.3 SA10.Q13.4 SA10.R18.1 | length 5.9
  Top Layer w0.254: SA10.Q13.4@155.84,37.567 SA10.R18.1@155.84,40.938 156.359,41.457 SA10.Q10.3@156.359,43.286
NetSA10.Q11_1: SA10.Q11.1 SA10.R12.2 | length 3.2
  Top Layer w0.254: SA10.R12.2@149.237,48.138 150.06,47.315 150.06,46.51 150.759,45.811 SA10.Q11.1@150.759,45.586
NetSA10.Q11_3: SA10.Q11.3 SA10.Q12.4 SA10.R17.1 | length 6
  Top Layer w0.254: SA10.Q12.4@149.237,37.567 SA10.R17.1@149.237,40.938 149.809,41.51 SA10.Q11.3@149.809,43.286
NetSA11.Q10_1: SA11.Q10.1 SA11.R11.2 | length 3.2
  Top Layer w0.254: SA11.R11.2@169.34,48.137 170.163,47.314 170.163,46.456 170.809,45.81 SA11.Q10.1@170.809,45.585
NetSA11.Q10_3: SA11.Q10.3 SA11.Q13.4 SA11.R18.1 | length 5.9
  Top Layer w0.254: SA11.Q13.4@169.34,37.566 SA11.R18.1@169.34,40.937 169.859,41.456 SA11.Q10.3@169.859,43.285
NetSA11.Q11_1: SA11.Q11.1 SA11.R12.2 | length 3.2
  Top Layer w0.254: SA11.R12.2@162.737,48.137 163.56,47.314 163.56,46.509 164.259,45.81 SA11.Q11.1@164.259,45.585
NetSA11.Q11_3: SA11.Q11.3 SA11.Q12.4 SA11.R17.1 | length 6
  Top Layer w0.254: SA11.Q12.4@162.737,37.566 SA11.R17.1@162.737,40.937 163.309,41.509 SA11.Q11.3@163.309,43.285
NetSA12.Q10_1: SA12.Q10.1 SA12.R11.2 | length 3.2
  Top Layer w0.254: SA12.R11.2@187.067,43.188 187.89,42.365 187.89,41.507 188.536,40.861 SA12.Q10.1@188.536,40.636
NetSA12.Q10_3: SA12.Q10.3 SA12.Q13.4 SA12.R18.1 | length 5.9
  Top Layer w0.254: SA12.Q13.4@187.067,32.617 SA12.R18.1@187.067,35.988 187.586,36.507 SA12.Q10.3@187.586,38.336
NetSA12.Q11_1: SA12.Q11.1 SA12.R12.2 | length 3.2
  Top Layer w0.254: SA12.R12.2@180.464,43.188 181.287,42.365 181.287,41.56 181.986,40.861 SA12.Q11.1@181.986,40.636
NetSA12.Q11_3: SA12.Q11.3 SA12.Q12.4 SA12.R17.1 | length 6
  Top Layer w0.254: SA12.Q12.4@180.464,32.617 SA12.R17.1@180.464,35.988 181.036,36.56 SA12.Q11.3@181.036,38.336
NetSA13.Q10_1: SA13.Q10.1 SA13.R11.2 | length 3.2
  Top Layer w0.254: SA13.R11.2@200.565,43.188 201.388,42.365 201.388,41.507 202.034,40.861 SA13.Q10.1@202.034,40.636
NetSA13.Q10_3: SA13.Q10.3 SA13.Q13.4 SA13.R18.1 | length 5.9
  Top Layer w0.254: SA13.Q13.4@200.565,32.617 SA13.R18.1@200.565,35.988 201.084,36.507 SA13.Q10.3@201.084,38.336
NetSA13.Q11_1: SA13.Q11.1 SA13.R12.2 | length 3.2
  Top Layer w0.254: SA13.R12.2@193.962,43.188 194.785,42.365 194.785,41.56 195.484,40.861 SA13.Q11.1@195.484,40.636
NetSA13.Q11_3: SA13.Q11.3 SA13.Q12.4 SA13.R17.1 | length 6
  Top Layer w0.254: SA13.Q12.4@193.962,32.617 SA13.R17.1@193.962,35.988 194.534,36.56 SA13.Q11.3@194.534,38.336
NetSA14.Q10_1: SA14.Q10.1 SA14.R11.2 | length 3.2
  Top Layer w0.254: SA14.R11.2@214.063,43.187 214.886,42.364 214.886,41.505 215.532,40.86 SA14.Q10.1@215.532,40.635
NetSA14.Q10_3: SA14.Q10.3 SA14.Q13.4 SA14.R18.1 | length 5.9
  Top Layer w0.254: SA14.Q13.4@214.063,32.615 SA14.R18.1@214.063,35.987 214.582,36.505 SA14.Q10.3@214.582,38.335
NetSA14.Q11_1: SA14.Q11.1 SA14.R12.2 | length 3.2
  Top Layer w0.254: SA14.R12.2@207.46,43.187 208.283,42.364 208.283,41.558 208.982,40.86 SA14.Q11.1@208.982,40.635
NetSA14.Q11_3: SA14.Q11.3 SA14.Q12.4 SA14.R17.1 | length 6
  Top Layer w0.254: SA14.Q12.4@207.46,32.615 SA14.R17.1@207.46,35.987 208.032,36.558 SA14.Q11.3@208.032,38.335
NetSAO1.Q1_1: SAO1.Q1.1 SAO1.R8.2 | length 2.5
  Top Layer w0.305: SAO1.R8.2@202.584,74.8 202.934,74.45 SAO1.Q1.1@202.934,72.432
NetSAO1.Q1_3: SAO1.Q1.3 SAO1.Q3.4 SAO1.R9.1 | length 15.8
  Top Layer w0.305: SAO1.Q1.3@205.234,71.482 205.459,71.482 207.459,69.483 SAO1.Q3.4@209.3,69.483 212.297,69.483 213.519,70.705 213.519,73.586 213.533,73.6 213.533,75.883 SAO1.R9.1@214.25,76.6
NetSAO2.Q1_1: SAO2.Q1.1 SAO2.R8.2 | length 2.7
  Top Layer w0.305: SAO2.R8.2@202.594,63.988 202.912,63.67 202.912,61.457 SAO2.Q1.1@202.944,61.425
NetSAO2.Q1_3: SAO2.Q1.3 SAO2.Q3.4 SAO2.R9.1 | length 16.2
  Top Layer w0.305: SAO2.Q1.3@205.244,60.475 205.469,60.475 207.469,58.476 SAO2.Q3.4@209.324,58.476 212.273,58.476 213.543,59.746 213.543,62.68 214.476,63.613 214.476,64.795 SAO2.R9.1@215.274,65.593
NetSP1.Q10_1: SP1.Q10.1 SP1.R11.2 | length 3.5
  Top Layer w0.305: SP1.Q10.1@31.608,88.462 31.833,88.462 33.235,89.864 33.374,89.864 SP1.R11.2@34.172,90.662
NetSP1.Q10_3: SP1.Q10.3 SP1.Q13.4 SP1.R18.1 | length 6.6
  Top Layer w0.254: SP1.Q13.4@23.205,90.702 26.696,90.702 26.768,90.629 27.878,90.629 28.91,89.598 28.91,89.585 29.083,89.412 SP1.Q10.3@29.308,89.412
NetSP1.Q11_1: SP1.Q11.1 SP1.R12.2 | length 3.4
  Top Layer w0.254: SP1.Q11.1@31.608,95.421 31.833,95.421 32.985,96.573 33.349,96.573 SP1.R12.2@34.172,97.396
NetSP1.Q11_3: SP1.Q11.3 SP1.Q12.4 SP1.R17.1 | length 6.5
  Top Layer w0.254: SP1.Q12.4@23.205,97.436 26.656,97.436 SP1.R17.1@26.696,97.396 28.058,97.396 29.083,96.371 SP1.Q11.3@29.308,96.371
NetSP2.Q10_1: SP2.Q10.1 SP2.R11.2 | length 3.5
  Top Layer w0.254: SP2.Q10.1@31.608,72.872 31.833,72.872 33.21,74.249 33.349,74.249 SP2.R11.2@34.172,75.072
NetSP2.Q10_3: SP2.Q10.3 SP2.Q13.4 SP2.R18.1 | length 6.6
  Top Layer w0.254: SP2.Q13.4@23.205,75.112 26.696,75.112 26.769,75.04 27.879,75.04 28.91,74.008 28.91,73.995 29.083,73.822 SP2.Q10.3@29.308,73.822
NetSP2.Q11_1: SP2.Q11.1 SP2.R12.2 | length 3.4
  Top Layer w0.254: SP2.Q11.1@31.608,79.832 31.833,79.832 32.985,80.984 33.349,80.984 SP2.R12.2@34.172,81.807
NetSP2.Q11_3: SP2.Q11.3 SP2.Q12.4 SP2.R17.1 | length 6.5
  Top Layer w0.254: SP2.Q12.4@23.205,81.847 26.656,81.847 SP2.R17.1@26.696,81.807 28.058,81.807 29.083,80.782 SP2.Q11.3@29.308,80.782
NetSP3.Q10_1: SP3.Q10.1 SP3.R11.2 | length 3.5
  Top Layer w0.254: SP3.Q10.1@56.883,88.453 57.108,88.453 58.485,89.83 58.624,89.83 SP3.R11.2@59.447,90.653
NetSP3.Q10_3: SP3.Q10.3 SP3.Q13.4 SP3.R18.1 | length 6.6
  Top Layer w0.254: SP3.Q13.4@48.48,90.693 51.971,90.693 52.044,90.621 53.154,90.621 54.185,89.589 54.185,89.576 54.358,89.403 SP3.Q10.3@54.583,89.403
NetSP3.Q11_1: SP3.Q11.1 SP3.R12.2 | length 3.4
  Top Layer w0.254: SP3.Q11.1@56.883,95.413 57.108,95.413 58.26,96.565 58.624,96.565 SP3.R12.2@59.447,97.388
NetSP3.Q11_3: SP3.Q11.3 SP3.Q12.4 SP3.R17.1 | length 6.5
  Top Layer w0.254: SP3.Q12.4@48.48,97.428 51.931,97.428 SP3.R17.1@51.971,97.388 53.333,97.388 54.358,96.363 SP3.Q11.3@54.583,96.363
NetSP4.Q10_1: SP4.Q10.1 SP4.R11.2 | length 3.5
  Top Layer w0.254: SP4.Q10.1@56.885,72.862 57.11,72.862 58.487,74.239 58.626,74.239 SP4.R11.2@59.449,75.062
NetSP4.Q10_3: SP4.Q10.3 SP4.Q13.4 SP4.R18.1 | length 6.6
  Top Layer w0.254: SP4.Q13.4@48.482,75.102 51.973,75.102 52.045,75.03 53.155,75.03 54.187,73.998 54.187,73.985 54.36,73.812 SP4.Q10.3@54.585,73.812
NetSP4.Q11_1: SP4.Q11.1 SP4.R12.2 | length 3.4
  Top Layer w0.254: SP4.Q11.1@56.885,79.822 57.11,79.822 58.262,80.974 58.626,80.974 SP4.R12.2@59.449,81.797
NetSP4.Q11_3: SP4.Q11.3 SP4.Q12.4 SP4.R17.1 | length 6.5
  Top Layer w0.254: SP4.Q12.4@48.482,81.837 51.933,81.837 SP4.R17.1@51.973,81.797 53.335,81.797 54.36,80.772 SP4.Q11.3@54.585,80.772
PI_3: H_PIO.15 Rpi_GPIO1.3 | length 101.6
  Top Layer w0.305: v1(69.89,116.55) 70.37,117.03 73.49,117.03 74.73,118.27 74.73,122.08 75.75,123.1 77.42,123.1 Rpi_GPIO1.3@78.59,124.27
  Bottom Layer w0.305: H_PIO.15@6.35,81.22 7.64,82.51 9.66,82.51 12.358,85.208 12.358,101.279 22.549,111.47 25.41,111.47 ; 25.527,111.516 28.647,114.637 67.977,114.637 v1(69.89,116.55)
PI_5: H_PIO.14 Rpi_GPIO1.5 | length 95.1
  Top Layer w0.305: H_PIO.14@8.89,83.76 12.021,86.891 12.021,102.408 v1(21.92,112.307) ; v1(70.279,117.763) 71.349,117.763 72.3,118.714 72.3,122.24 73.11,123.05 74.83,123.05 Rpi_GPIO1.5@76.05,124.27
  Bottom Layer w0.305: v1(21.92,112.307) 25.508,112.307 28.409,115.208 67.576,115.208 70.131,117.763 v1(70.279,117.763)
PI_11: H_PIO.12 Rpi_GPIO1.11 | length 87.8
  Top Layer w0.305: H_PIO.12@8.898,86.36 10.81,88.272 10.81,104.04 21.006,114.236 v1(21.92,114.236)
  Bottom Layer w0.305: v1(21.92,114.236) 25.806,114.236 27.988,116.418 66.238,116.418 67.114,117.294 67.114,122.954 Rpi_GPIO1.11@68.43,124.27
PI_12: H_PIO.13 Rpi_GPIO1.12 | length 90
  Top Layer w0.305: H_PIO.13@6.35,83.76 7.6,85.01 9.35,85.01 11.462,87.123 11.462,103.302 21.431,113.271 v1(21.92,113.271)
  Bottom Layer w0.305: v1(21.92,113.271) 25.675,113.271 28.232,115.828 67.078,115.828 68.43,117.18 Rpi_GPIO1.12@68.43,121.73
PI_13: C1.1 pad.RST@1 R1.1 Rpi_GPIO1.13 | length 127.3
  Top Layer w0.305: Rpi_GPIO1.13@65.89,124.27 65.89,124.756 67.416,126.282 v1(94.653,126.282) ; v1(124.794,116.047) 124.818,116.071 133.136,116.071 v1(133.15,116.085) ; R1.1@160.75,139.11 160.75,135.764 C1.1@161.854,134.66
  Top Layer w0.381: C1.1@161.854,134.66 161.874,134.68 169.99,134.68 172.7,137.39 173.126,137.39
  Bottom Layer w0.305: v1(94.653,126.282) 99.14,126.282 110.512,114.91 123.581,114.91 124.718,116.047 v1(124.794,116.047) ; v1(133.15,116.085) 135.96,116.085 154.535,134.66 C1.1@161.854,134.66
PI_19: H_PIO.11 Rpi_GPIO1.19 | length 78.2
  Top Layer w0.305: H_PIO.11@6.35,86.3 7.6,87.55 9.298,87.55 10.251,88.503 10.251,104.531 20.92,115.2 21.225,115.2 21.231,115.193 21.839,115.193 v1(21.876,115.156)
  Bottom Layer w0.305: v1(21.876,115.156) 21.92,115.2 25.921,115.2 27.739,117.018 52.975,117.018 57,121.043 57,123 Rpi_GPIO1.19@58.27,124.27
PI_21: H_PIO.9 Rpi_GPIO1.21 | length 81.3
  Bottom Layer w0.305: H_PIO.9@6.35,88.84 3.98,91.21 3.98,101.74 14.07,111.83 14.07,119.05 21.84,126.82 53.18,126.82 Rpi_GPIO1.21@55.73,124.27
PI_23: H_PIO.7 Rpi_GPIO1.23 | length 75
  Bottom Layer w0.305: H_PIO.7@6.35,91.38 4.55,93.18 4.55,101.42 14.66,111.53 14.66,118.67 22.22,126.23 51.67,126.23 53.19,124.71 Rpi_GPIO1.23@53.19,124.27
PI_24: H_PIO.10 Rpi_GPIO1.24 | length 66.6
  Bottom Layer w0.305: H_PIO.10@8.89,88.84 11.79,91.74 11.79,101.78 19.368,109.358 19.368,109.378 19.589,109.599 19.589,113.859 23.358,117.628 49.507,117.628 52.85,120.972 52.85,121.067 53.19,121.407 Rpi_GPIO1.24@53.19,121.73
PI_26: H_PIO.8 Rpi_GPIO1.26 | length 62.5
  Bottom Layer w0.305: H_PIO.8@8.89,91.38 11.199,93.689 11.199,96.888 11.208,96.897 11.208,102.008 19.03,109.83 19.03,114.28 22.958,118.208 48.279,118.208 50.65,120.579 Rpi_GPIO1.26@50.65,121.73
PI_32: H_PIO.6 Rpi_GPIO1.32 | length 52.3
  Bottom Layer w0.305: H_PIO.6@8.89,93.92 10.64,95.67 10.64,97.231 10.649,97.24 10.649,102.279 18.44,110.07 18.44,114.8 22.407,118.767 40.067,118.767 Rpi_GPIO1.32@43.03,121.73
PI_33: H_PIO.5 J10.1 Rpi_GPIO1.33 | length 237.8
  Top Layer w0.305: Rpi_GPIO1.33@40.49,124.27 40.49,127.476 v1(42.218,129.204) ; v1(42.553,130.93) 96.248,130.93 105.638,121.54 v1(106.802,121.54) ; v1(124.797,119.036) 124.872,118.961 v1(134.503,118.961)
  Bottom Layer w0.305: H_PIO.5@6.35,93.92 7.73,95.3 7.73,101.85 16.56,110.68 16.56,115.64 21.431,120.511 33.677,120.511 34.128,120.962 34.217,121.051 34.217,121.18 34.206,122.406 34.88,123.08 39.3,123.08 Rpi_GPIO1.33@40.49,124.27 ; v1(42.218,129.204) 42.553,129.539 v1(42.553,130.93) ; v1(106.802,121.54) 107.955,121.54 112.107,117.388 122.595,117.388 124.243,119.036 v1(124.797,119.036) ; v1(134.503,118.961) 135.059,118.961 154.926,138.828 162.154,138.828 163.754,140.429 163.754,143.458 163.754,143.714 170.898,150.858 171.155,150.858 179.061,150.858 186.792,158.589 191.212,158.589 J10.1@193.103,160.48
PI_35: H_PIO.3 Rpi_GPIO1.35 | length 52.7
  Bottom Layer w0.305: H_PIO.3@6.38,96.49 5.18,97.69 5.18,101.24 15.22,111.28 15.22,118.07 22.82,125.67 36.55,125.67 Rpi_GPIO1.35@37.95,124.27
PI_36: H_PIO.4 J9.1 Rpi_GPIO1.36 | length 231.4
  Top Layer w0.305: Rpi_GPIO1.36@37.95,121.73 39.334,123.114 39.334,127.258 42.342,130.266 96.122,130.266 105.506,120.882 v1(107.547,120.882) ; v1(125.458,118.304) 135.441,118.304 v1(135.463,118.326)
  Bottom Layer w0.305: H_PIO.4@8.89,96.46 10.09,97.66 10.09,102.52 17.809,110.239 17.809,115.149 21.986,119.326 36.236,119.326 37.95,121.04 Rpi_GPIO1.36@37.95,121.73 ; v1(107.547,120.882) 107.584,120.844 107.758,120.844 111.863,116.739 122.736,116.739 124.301,118.304 v1(125.458,118.304) ; v1(135.463,118.326) 155.374,138.237 162.353,138.237 164.313,140.197 164.313,143.483 171.13,150.299 179.292,150.299 186.933,157.94 J9.1@193.103,157.94
PI_38: H_PIO.2 Rpi_GPIO1.38 | length 40.8
  Bottom Layer w0.305: H_PIO.2@8.89,99 8.89,102.11 17.25,110.47 17.25,115.4 21.803,119.953 33.909,119.953 35.41,121.454 Rpi_GPIO1.38@35.41,121.73
PI_40: H_PIO.1 Rpi_GPIO1.40 | length 40.2
  Bottom Layer w0.305: H_PIO.1@6.35,99 6.35,101.48 15.87,111 15.87,115.86 21.08,121.07 31.887,121.07 32.547,121.73 Rpi_GPIO1.40@32.87,121.73
PI_HS_1: H_PSW.1 SP1.Q12.5 SP1.Q12.6 | length 48
  Top Layer w0.305: H_PSW.1@6.35,54.5 6.948,55.098 9.328,57.478 9.328,70.998 13.305,74.976 13.305,81.964 14.982,83.641 14.982,89.089 15.651,89.759 15.651,94.641 17.029,96.019 17.102,96.019 17.25,96.166 SP1.Q12.6@17.805,96.166 SP1.Q12.5@17.805,97.436
PI_HS_2: H_PSW.3 SP1.Q13.5 SP1.Q13.6 | length 45.2
  Top Layer w0.305: H_PSW.3@6.35,51.96 7.506,53.116 9.536,53.116 10.449,54.029 10.449,70.403 14.423,74.377 14.423,81.482 16.099,83.158 16.099,88.601 16.873,89.375 17.353,89.375 17.748,89.375 SP1.Q13.6@17.805,89.432 SP1.Q13.5@17.805,90.702
PI_HS_3: H_PSW.5 SP2.Q12.5 SP2.Q12.6 | length 38.5
  Top Layer w0.305: H_PSW.5@6.35,49.42 7.506,50.576 9.142,50.576 11.566,53.001 11.566,69.94 15.54,73.914 15.54,78.906 17.063,80.429 17.103,80.429 17.25,80.577 SP2.Q12.6@17.805,80.577 SP2.Q12.5@17.805,81.847
PI_HS_4: H_PSW.7 SP2.Q13.5 SP2.Q13.6 | length 34.4
  Top Layer w0.305: H_PSW.7@6.35,46.88 7.506,48.036 9.142,48.036 12.684,51.579 12.684,68.026 12.684,69.477 16.992,73.786 17.749,73.786 SP2.Q13.6@17.805,73.842 SP2.Q13.5@17.805,75.112
PI_HS_5: H_PSW.9 SP3.Q12.5 SP3.Q12.6 | length 78.2
  Top Layer w0.305: H_PSW.9@6.35,44.34 7.734,45.724 9.369,45.724 13.84,50.195 13.84,61.274 21.567,69.002 36.27,69.002 37.963,70.695 37.963,91.586 42.534,96.158 SP3.Q12.6@43.08,96.158 SP3.Q12.5@43.08,97.428
PI_HS_6: H_PSW.11 SP3.Q13.5 SP3.Q13.6 | length 74.2
  Top Layer w0.305: H_PSW.11@6.35,41.8 7.734,43.184 9.694,43.184 10.449,43.938 10.449,45.054 14.958,49.562 14.958,60.811 22.03,67.884 36.733,67.884 39.081,70.232 39.081,72.022 39.081,86.054 42.302,89.275 42.378,89.275 42.525,89.423 SP3.Q13.6@43.08,89.423 SP3.Q13.5@43.08,90.693
PI_HS_7: H_PSW.13 SP4.Q12.5 SP4.Q12.6 | length 67.8
  Top Layer w0.305: H_PSW.13@6.35,39.26 7.506,40.416 9.142,40.416 11.566,42.841 11.566,44.591 16.075,49.1 16.075,60.349 22.493,66.767 37.196,66.767 40.198,69.769 40.198,78.371 42.337,80.51 43.025,80.51 SP4.Q12.6@43.082,80.567 SP4.Q12.5@43.082,81.837
PI_HS_8: H_PSW.15 SP4.Q13.5 SP4.Q13.6 | length 63.6
  Top Layer w0.305: H_PSW.15@6.35,36.72 7.734,38.104 9.369,38.104 12.684,41.419 12.684,43.911 17.193,48.419 17.193,59.886 22.956,65.649 37.659,65.649 41.479,69.469 41.479,73.009 42.245,73.775 43.025,73.775 SP4.Q13.6@43.082,73.832 SP4.Q13.5@43.082,75.102
PI_LS_1: H_PSW.2 SP1.Q12.7 SP1.Q12.8 | length 45.8
  Top Layer w0.305: H_PSW.2@8.89,54.5 8.89,55.952 9.89,56.952 9.89,70.634 13.864,74.608 13.864,81.733 15.54,83.409 15.54,88.832 16.21,89.502 16.21,93.981 17.068,94.84 17.748,94.84 SP1.Q12.7@17.805,94.896 SP1.Q12.8@17.805,93.626
PI_LS_2: H_PSW.4 SP1.Q13.7 SP1.Q13.8 | length 40.1
  Top Layer w0.305: H_PSW.4@8.89,51.96 9.17,51.96 11.008,53.798 11.008,70.171 14.982,74.145 14.982,81.152 17.805,83.975 SP1.Q13.8@17.805,86.892 SP1.Q13.7@17.805,88.162
PI_LS_3: H_PSW.6 SP2.Q12.7 SP2.Q12.8 | length 35.2
  Top Layer w0.305: H_PSW.6@8.89,49.42 12.125,52.655 12.125,69.709 16.099,73.683 16.099,78.076 SP2.Q12.7@17.169,79.146 ; SP2.Q12.7@17.169,79.25 17.749,79.25 SP2.Q12.7@17.805,79.307 SP2.Q12.8@17.805,78.037 ; 17.182,77.775 SP2.Q12.8@17.182,77.809 ; SP2.Q12.8@17.398,78.025 SP2.Q12.8@17.433,78.025
PI_LS_4: H_PSW.8 SP2.Q13.7 SP2.Q13.8 | length 31.2
  Top Layer w0.305: H_PSW.8@8.89,46.88 13.243,51.233 13.243,68.968 16.847,72.572 SP2.Q13.7@17.805,72.572 SP2.Q13.8@17.805,71.302
PI_LS_5: H_PSW.10 SP3.Q12.7 SP3.Q12.8 | length 75.2
  Top Layer w0.305: H_PSW.10@8.89,44.34 14.399,49.849 14.399,61.043 21.799,68.443 36.502,68.443 38.522,70.463 38.522,91.317 42.093,94.888 SP3.Q12.7@43.08,94.888 SP3.Q12.8@43.08,93.618
PI_LS_6: H_PSW.12 SP3.Q13.7 SP3.Q13.8 | length 71.2
  Top Layer w0.305: H_PSW.12@8.89,41.8 9.213,41.8 9.6,42.186 9.601,42.186 11.008,43.593 11.008,44.822 15.516,49.331 15.516,60.58 22.262,67.325 36.965,67.325 39.639,70 39.639,85.823 41.97,88.153 SP3.Q13.7@43.08,88.153 SP3.Q13.8@43.08,86.883
PI_LS_7: H_PSW.14 SP4.Q12.7 SP4.Q12.8 | length 64.5
  Top Layer w0.305: H_PSW.14@8.89,39.26 12.125,42.495 12.125,44.205 16.634,48.714 16.634,60.117 22.725,66.208 37.428,66.208 40.757,69.537 40.757,77.77 42.227,79.24 43.025,79.24 SP4.Q12.7@43.082,79.297 SP4.Q12.8@43.082,78.027
PI_LS_8: H_PSW.16 SP4.Q13.7 SP4.Q13.8 | length 60.2
  Top Layer w0.305: H_PSW.16@8.89,36.72 8.89,36.915 9.52,37.545 9.6,37.545 13.243,41.187 13.243,43.679 17.752,48.188 17.752,59.654 23.188,65.09 37.89,65.09 42.067,69.267 42.067,72.032 42.597,72.562 SP4.Q13.7@43.082,72.562 SP4.Q13.8@43.082,71.292
PI_SW1: Rpi_GPIO1.37 SP1.Q12.2 SP1.R12.1 | length 44.6
  Top Layer w0.254: SP1.Q12.2@23.205,94.896 24.257,94.896 24.974,94.179 25.588,93.565 v1(31.116,93.565) 32.447,94.896 SP1.R12.1@34.172,94.896 ; v1(34.2,112.782) 34.2,123.06 Rpi_GPIO1.37@35.41,124.27
  Bottom Layer w0.254: v1(31.116,93.565) 34.2,96.649 v1(34.2,112.782)
PI_SW2: Rpi_GPIO1.31 SP1.Q13.2 SP1.R11.1 | length 57.7
  Top Layer w0.254: SP1.Q13.2@23.205,88.162 24.257,88.162 24.974,87.444 25.588,86.831 v1(31.341,86.831) 32.672,88.162 SP1.R11.1@34.172,88.162 ; Rpi_GPIO1.31@43.03,124.27 44.186,123.114 v1(44.186,112.668)
  Bottom Layer w0.254: v1(31.341,86.831) 36.236,91.725 36.236,108.762 40.142,112.668 v1(44.186,112.668)
PI_SW3: Rpi_GPIO1.29 SP2.Q12.2 SP2.R12.1 | length 65.5
  Top Layer w0.254: SP2.Q12.2@23.205,79.307 24.258,79.307 24.975,78.589 25.589,77.976 v1(31.116,77.976) 32.447,79.307 SP2.R12.1@34.172,79.307 ; Rpi_GPIO1.29@45.57,124.27 45.57,124.128 46.915,122.783 v1(46.915,110.248)
  Bottom Layer w0.254: v1(31.116,77.976) 37.941,84.801 ; 37.976,84.801 37.976,97.814 46.915,106.753 v1(46.915,110.248)
PI_SW4: Rpi_GPIO1.22 SP2.Q13.2 SP2.R11.1 | length 72.6
  Top Layer w0.254: SP2.Q13.2@23.205,72.572 24.258,72.572 24.975,71.855 25.589,71.241 v1(31.341,71.241) 32.672,72.572 SP2.R11.1@34.172,72.572 ; v1(55.73,111.524) Rpi_GPIO1.22@55.73,121.73
  Bottom Layer w0.254: v1(31.341,71.241) 39.892,79.792 ; 39.927,79.792 39.927,95.721 v1(55.73,111.524)
PI_SW5: Rpi_GPIO1.18 SP3.Q12.2 SP3.R12.1 | length 42.7
  Top Layer w0.254: SP3.Q12.2@48.48,94.888 49.533,94.888 50.864,93.557 v1(54.849,93.557) 56.391,93.557 57.722,94.888 SP3.R12.1@59.447,94.888 ; v1(59.732,111.607) 59.732,120.652 Rpi_GPIO1.18@60.81,121.73
  Bottom Layer w0.254: v1(54.849,93.557) 54.849,106.719 59.732,111.602 v1(59.732,111.607)
PI_SW6: Rpi_GPIO1.15 SP3.Q13.2 SP3.R11.1 | length 53
  Top Layer w0.254: SP3.Q13.2@48.48,88.153 49.533,88.153 50.25,87.436 50.864,86.822 v1(54.896,86.822) 56.616,86.822 57.947,88.153 SP3.R11.1@59.447,88.153 ; v1(61.316,110.309) 61.316,117.559 62.027,118.27 62.027,122.947 Rpi_GPIO1.15@63.35,124.27
  Bottom Layer w0.254: v1(54.896,86.822) 57.115,89.04 57.115,106.107 v1(61.316,110.309)
PI_SW7: Rpi_GPIO1.16 SP4.Q12.2 SP4.R12.1 | length 59.3
  Top Layer w0.254: SP4.Q12.2@48.482,79.297 49.534,79.297 50.865,77.966 54.896,77.966 v1(54.93,78) 56.427,78 57.724,79.297 SP4.R12.1@59.449,79.297 ; v1(63.26,109.691) 63.26,121.64 Rpi_GPIO1.16@63.35,121.73
  Bottom Layer w0.254: v1(54.93,78) 54.93,83.393 58.753,87.216 58.753,105.197 63.247,109.691 v1(63.26,109.691)
PI_SW8: Rpi_GPIO1.7 SP4.Q13.2 SP4.R11.1 | length 73.9
  Top Layer w0.254: SP4.Q13.2@48.482,72.562 49.534,72.562 50.252,71.845 50.865,71.231 v1(54.74,71.231) 56.618,71.231 57.949,72.562 SP4.R11.1@59.449,72.562 ; v1(64.651,111.102) 64.651,114.49 69.561,119.401 69.561,121.92 70.756,123.115 72.355,123.115 Rpi_GPIO1.7@73.51,124.27
  Bottom Layer w0.254: v1(54.74,71.231) 54.74,72.109 54.785,72.154 54.785,72.677 54.74,72.722 54.74,73.269 56.702,75.231 56.702,81.894 61.037,86.229 61.037,105.177 64.651,108.79 v1(64.651,111.102)